# Altium PCB ECE453_Custom.PcbDoc
Units mil, origin at the board's own origin, x right, y up, seen from the top; angles counter-clockwise.
Board outline 2347.18 x 3917.24 mil, 2 copper layers (Top Layer, Bottom Layer); 26 components, 14 nets, 77 pads, 7 vias.
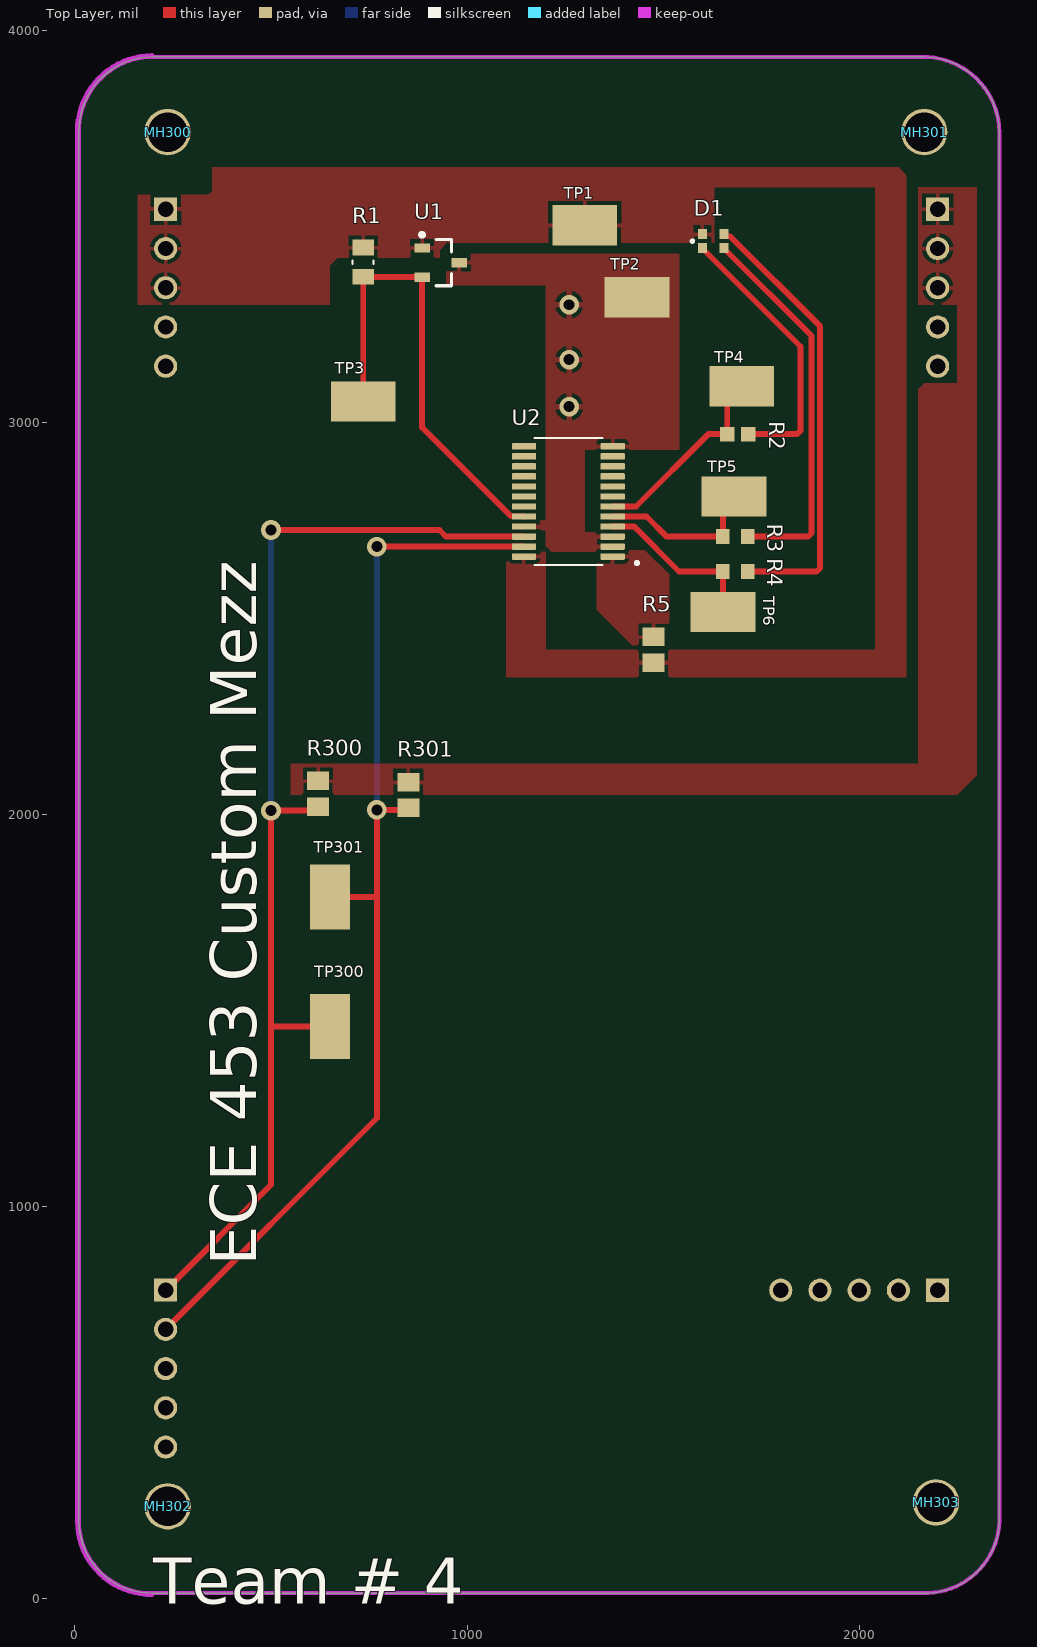
[diagram p0: Top Layer view]
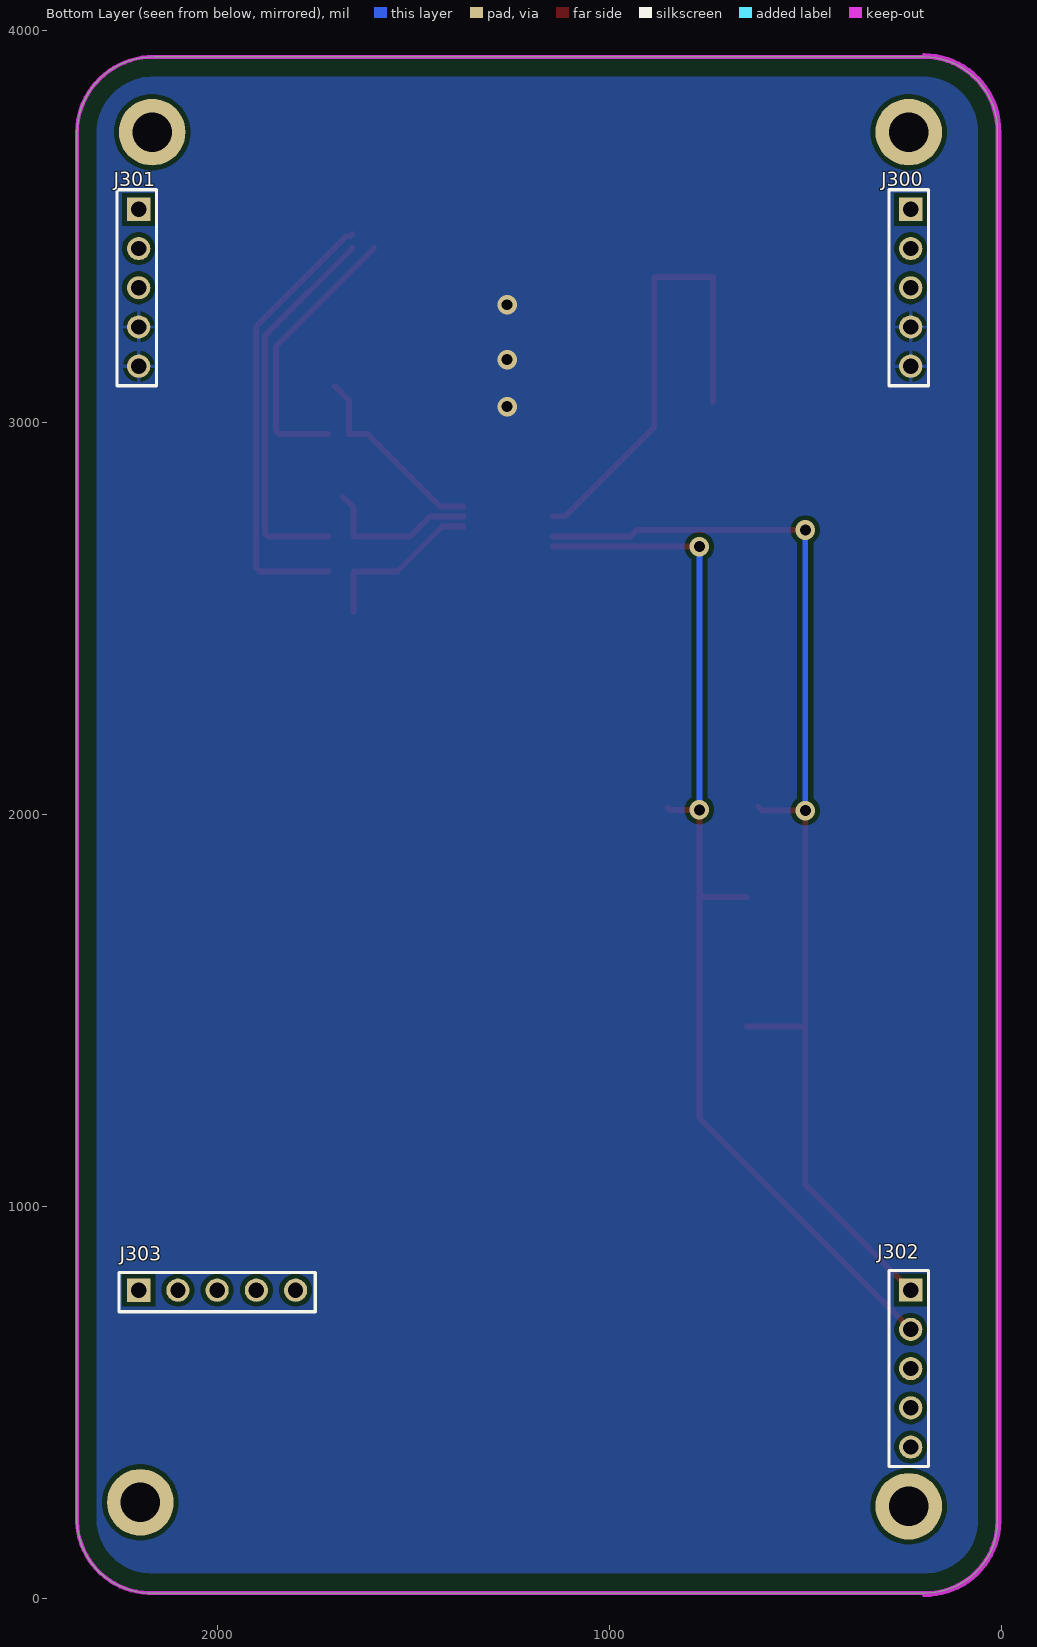
[diagram p1: Bottom Layer view, seen from below]
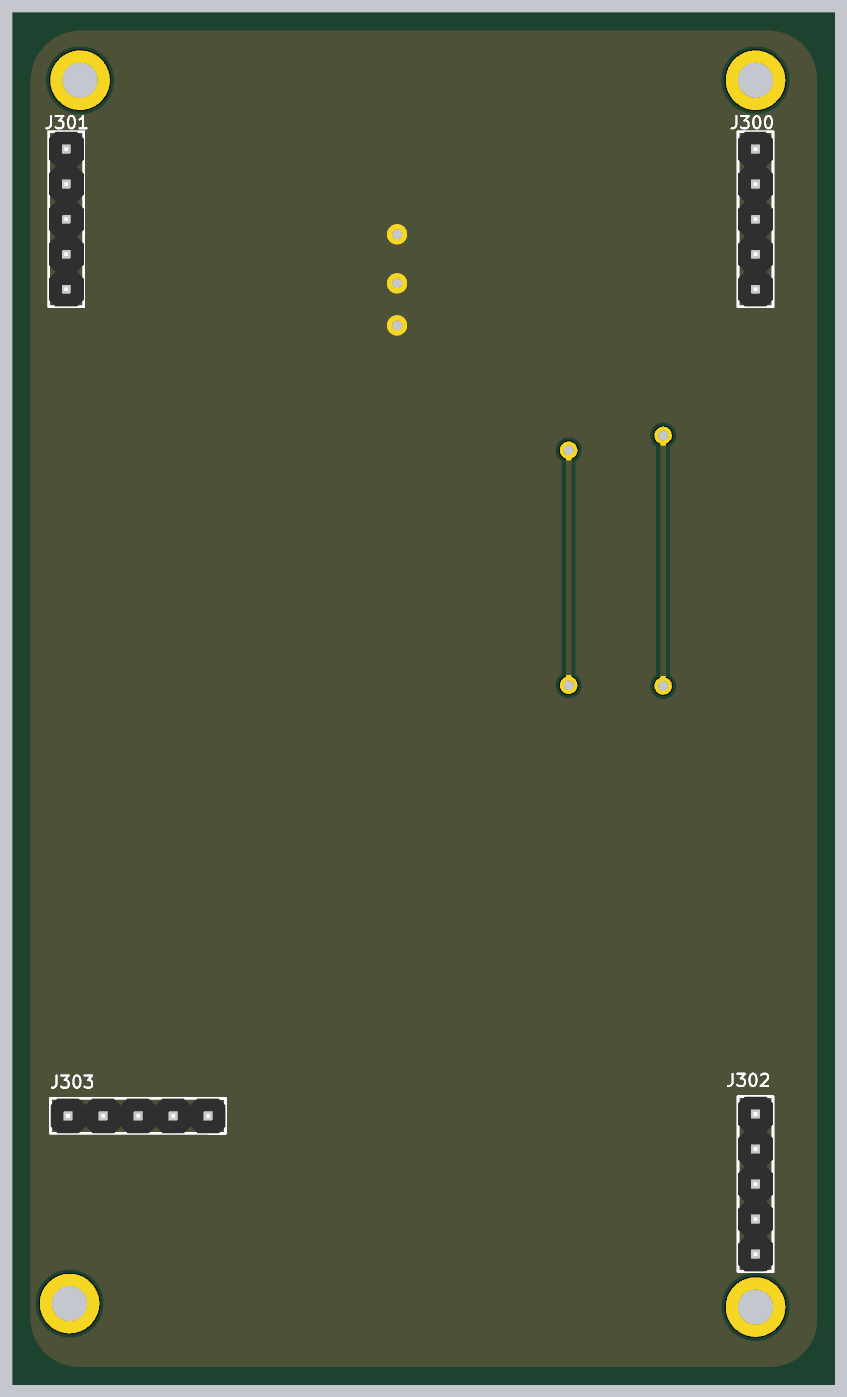
[diagram p2: 3D render of the assembled board from below, using the file's embedded part models]

## Layer stack, top to bottom
Top Solder: solder mask 0.4, Solder Resist, Dk 3.5
Top Layer: signal copper 1.4
Dielectric1: dielectric 12.6, FR-4, Dk 4.8
Bottom Layer: signal copper 1.4
Bottom Solder: solder mask 0.4, Solder Resist, Dk 3.5

## Board outline
10.01,196.88 ccw(c194.35,199.35) 196.78,15.01 cw(c196.85,10) 196.85,15.02 2160.35,15.02 cw(c2160.35,10) 2160.58,15.01 ccw(c2167.85,204.35) 2357.19,196.95 2357.19,3740.13 ccw(c2162.85,3737.66) 2160.45,3931.99 ccw(c2162.85,3737.66) 2160.42,3931.99 2160.45,3931.99 cw(c2160.35,3937.01) 2160.35,3931.99 200,3931.99 cw(c200,3937.01) 198.43,3932.25 cw(c196.85,3937.01) 196.91,3931.99 ccw(c199.35,3742.66) 10.01,3740.25 ccw(c199.35,3742.66) 10.01,3740.22 10.01,3740.25 cw(c5,3740.16) 10.01,3740.16 10.01,196.88 cw(c194.35,199.35)

## Design rules (kind name [scope] priority, off if disabled: settings)
BoardOutlineClearance [All] p1: gap=50 ignorepadtopadclearanceinfootprint=FALSE
Clearance Polygon_Clearance [All vs InPolygon] p1: gap=12 ignorepadtopadclearanceinfootprint=TRUE
Clearance [All] p2: gap=7 ignorepadtopadclearanceinfootprint=TRUE
ComponentClearance [InComponent('U3')] p1: gap=0 collisioncheckmode=3 verticalgap=10 showdistances=FALSE
Height [All] p1: minheight=0 maxheight=866.14 prefheight=500
HoleSize [All] p1: absolutevalues=TRUE maxlimit=250 minlimit=15 maxpercent=80.000 minpercent=20.000
MinimumAnnularRing [All] p1: minimumring=7
MinimumSolderMaskSliver [All] p1: minsoldermaskwidth=1
NetAntennae NetAntennae_5.0V [InNet('5.0V')] p1: netantennaetolerance=0
NetAntennae NetAntennae_3.3V [InNet('3.3V')] p2: netantennaetolerance=0
PolygonConnect [IsNamedPolygon('5.0V_L01_P019') or IsNamedPolygon('3.3V_L01_P020') vs IsVia] p1: connectstyle=Relief reliefconductorwidth=10 reliefentries=4 polygonreliefangle="90 Angle" airgapwidth=10
PolygonConnect PolygonConnect_2 [All vs IsVia] p2: connectstyle=Relief reliefconductorwidth=15 reliefentries=4 polygonreliefangle="90 Angle" airgapwidth=10
PolygonConnect PolygonConnect_1 [All] p3: connectstyle=Relief reliefconductorwidth=10 reliefentries=4 polygonreliefangle="90 Angle" airgapwidth=10
RoutingVias [All] p1: holewidth=15 width=30 viastyle="Through Hole" minholewidth=15 minwidth=30 maxholewidth=28 maxwidth=50
SilkToSilkClearance [All] p1: silktosilkclearance=1
SilkToSolderMaskClearance [IsPad] p1: minsilkscreentomaskgap=1 clearancetoexposedcopper=TRUE
SolderMaskExpansion [All] p1: expansion=4 istentingtop=FALSE
UnRoutedNet [All] p1: checkbadconnections=TRUE
Width [All] p1: maxlimit=472.44 minlimit=7 preferedwidth=15 minimp=50.000000 maximp=50.000000 favimp=50.000000
22 further rules are at their usual default settings.

## Components (designator, comment, footprint, x,y, rotation, side; value= is the part's Value field where it differs from the comment)
D1 "EAST1616RGBA2" EAST1616RGBA2 1655.12,3480 r180 top
J300 "CONN_HEADER_MALE_1x5" HDR1X5 236.22,3543.31 r270 bottom
J301 "CONN_HEADER_MALE_1x5" HDR1X5 2204.72,3543.31 r270 bottom
J302 "CONN_HEADER_MALE_1x5" HDR1X5 236.22,787.4 r270 bottom
J303 "CONN_HEADER_MALE_1x5" HDR1X5 2199.61,782.28 r180 bottom
MH300 "MHOLE_2_55MM" MHOLE_2_55MM#1 236.22,3740.16 r90 top locked
MH301 "MHOLE_2_55MM" MHOLE_2_55MM#1 2165.35,3740.16 r90 top locked
MH302 "MHOLE_2_55MM" MHOLE_2_55MM#1 236.22,236.22 r90 top locked
MH303 "MHOLE_2_55MM" MHOLE_2_55MM#2 2165.35,236.22 r0 top locked
R1 "RMCF0805JT510R" RESC2012X65N 735,3408.58 r90 top
R2 "RNCP0603FTD150R" RESC1508X50N 1690,2970 r0 top
R3 "ERJ-3GEYJ910V" RESC1608X55N 1683.6,2708.82 r0 top
R4 "ERJ-3GEYJ910V" RESC1608X55N 1683.6,2620 r0 top
R5 "RNCP0805FTD10K0" RESC2012X60N 1475,2420 r270 top
R300 "RNCP0805FTD10K0" RESC2012X60N 620,2052.87 r90 top
R301 "RNCP0805FTD10K0" RESC2012X60N 850,2050 r90 top
TP1 "TP_1206" TP-SMC-1206 1300,3502.8 r0 top
TP2 "TP_1206" TP-SMC-1206 1433.19,3319.04 r0 top
TP3 "TP_1206" TP-SMC-1206 735,3053.51 r0 top
TP4 "TP_1206" TP-SMC-1206 1700,3092.32 r0 top
TP5 "TP_1206" TP-SMC-1206 1680,2811.18 r0 top
TP6 "TP_1206" TP-SMC-1206 1652.1,2516.28 r0 top
TP300 "TP_1206" TP-SMC-1206 650,1460 r90 top
TP301 "TP_1206" TP-SMC-1206 650,1790 r90 top
U1 "TLV4961-1M" SOT95P245X110-3N 932.24,3407.4 r0 top
U2 "TCA9535PWR" SOP65P640X120-24N 1257.99,2798.39 r180 top

## Footprints (in the part's own frame and the unit in brackets; to place one, negate y for a bottom-side part, rotate by r counter-clockwise, add the part's x,y. Pads: shape width x height; smd on the part's side, far side on the other; paste and mask are expansions set on the pad)
EAST1616RGBA2 [mm] "EAST1616RGBA2 RBG LED"
  rect 0.6x0.65 smd: 1(1.4,0.9) 2(0,0.9) 3(1.4,0) 4(0,0)
  silkscreen extent 1.95,0.35 2.15,0.55
HDR1X5 [mil] "Connector; Header; 5 Position"
  rect 59.06x59.06 hole 39: 1(0,5)
  round 59.06 hole 39: 2(100,5) 3(200,5) 4(300,5) 5(400,5)
  silkscreen extent -50,-50 450,50, body extent -50,-50 450,50, height 330
MHOLE_2_55MM#1 [mm] "2.55MM Mounting Hole"
  round 3 / inner round 4.572 / far side round 4.318 hole 2.55: 1(0,0)
MHOLE_2_55MM#2 [mm]
  round 3 / inner round 4.572 / far side round 4.318 hole 2.55: 1(0.762,0.254)
RESC1508X50N [mm]
  rect 0.97x0.93 smd: 1(-0.68,0) 2(0.68,0)
RESC1608X55N [mm]
  rect 0.87x0.98 smd: 1(-0.8,0) 2(0.8,0)
RESC2012X60N [mm]
  rect 1.2x1.42 smd: 1(-0.835,0) 2(0.835,0)
RESC2012X65N [mm]
  rect 1.01x1.38 smd: 1(-0.95,0) 2(0.95,0)
  silkscreen extent -0.12,-0.68 0.12,0.68
SOP65P640X120-24N [mm]
  rrect25% 1.57x0.41 smd: 1(-2.87,3.575) 2(-2.87,2.925) 3(-2.87,2.275) 4(-2.87,1.625) 5(-2.87,0.975) 6(-2.87,0.325) 7(-2.87,-0.325) 8(-2.87,-0.975) 9(-2.87,-1.625) 10(-2.87,-2.275) 11(-2.87,-2.925) 12(-2.87,-3.575) 13(2.87,-3.575) 14(2.87,-2.925) 15(2.87,-2.275) 16(2.87,-1.625) 17(2.87,-0.975) 18(2.87,-0.325) 19(2.87,0.325) 20(2.87,0.975) 21(2.87,1.625) 22(2.87,2.275) 23(2.87,2.925) 24(2.87,3.575)
  silkscreen extent -4.54,-4.1 2.2,4.1
SOT95P245X110-3N [mm] "SOT23, 3-Leads, Body 2.90x2.45mm, Pitch 0.95mm, IPC Medium Density"
  rect 1x0.6 smd: 1(-1.2,0.95) 2(-1.2,-0.95) 3(1.2,0)
  silkscreen extent -1.32,-1.5 0.7,1.92, body extent -0.7,-1.5 0.7,1.5, height 1.1
TP-SMC-1206 [mm]
  rect 4.2x2.6 smd mask+0: 1(0,0)
  body extent -1.57,-0.79 1.63,0.81, height 1.22

## Part data
J300 J301 J302 J303: "Header, 5-Pin", Color=Black, Manufacturer 1=Sullins, Manufacturer Part Number 1=PREC005SACN-RC, Package Quantity=1, Supplier Part Number 1=S1032EC-05-ND, ComponentLink1Description=http://www.farnell.com/cad/1737268.pdf, ComponentLink1URL=http://www.farnell.com/cad/1737268.pdf, ComponentLink2Description=http://katalog.we-online.de/em/datasheet/6130xx11121.pdf, ComponentLink2URL=http://katalog.we-online.de/em/datasheet/6130xx11121.pdf, ComponentLink3Description=https://datasheet.ciiva.com/741/xrxczzzsxxn-rc-st-11635-b-741840.pdf?src-supplier=Digi-Key, ComponentLink3URL=https://datasheet.ciiva.com/741/xrxczzzsxxn-rc-st-11635-b-741840.pdf?src-supplier=Digi-Key, Connector Type="Male Pin", Contact Mating Length=0.23inch, Contact Plating=Tin, Mount="Through Hole", Number of Positions=5, Number of Rows=1, Packaging=Bulk, Pitch=0.1inch, Pricing 1="1=0.19000, 10=0.17400, 25=0.12960, 50=0.11120, 100=0.10740, 250=0.09264, 500=0.08892 (USD)", RoHS=Yes, Stock 1=0, Supplier 1=Digi-Key, Termination=Solder
MH300 MH301 MH302 MH303: "Mounting Holde", Manufacturer Part Number="UW MTHOLE"
R1 R2: Package=None, Availability=Unavailable, Price=None
  R1: MP=RMCF0805JT510R
  R2: MP=RNCP0603FTD150R
R3 R4: "Res Thick Film 0603 91 Ohm 5% 1/10W Ã‚Â±200ppm/Ã‚Â°C Molded SMD SMD Punched Carrier T/R", Package=None, Availability=Unavailable, MP=ERJ-3GEYJ910V, Price=None
R5 R300 R301: "10 kOhms Â±1% 0.25W, 1/4W Chip Resistor 0805 _2012 Metric_ Anti-Sulfur, Moisture Resistant Thin Film", Package="2012 Stackpole", Digi-Key_Part_Number=RNCP0805FTD10K0CT-ND, Digi-Key_Purchase_URL=https://www.digikey.com/product-detail/en/stackpole-electronics-inc/RNCP0805FTD10K0/RNCP0805FTD10K0CT-ND/2240601?utm_source=snapeda&utm_medium=aggregator&utm_campaign=symbol, MF="Stackpole Electronics Inc", MP=RNCP0805FTD10K0, SnapEDA_Link=https://www.snapeda.com/parts/RNCP0805FTD10K0/Stackpole%20Electronics%20Inc/view-part/3229162/?ref=snap
TP1 TP2 TP3 TP4 TP5 TP6 TP300 TP301: "Test Point SMD 1206", Case Size=1206, Manufacturer="TE Connectivity (Tyco Electronics)", Manufacturer Part Number=1625854-1, Operating Temperature="-55 to 125 C", Power Rating=N/R, Resistance Value="0 Ohm", Supplier Part Number=A106143CT-ND, ComponentLink1Description=https://datasheet.ciiva.com/6439/eng-ds-1773266-a-6439169.pdf, ComponentLink1URL=https://datasheet.ciiva.com/6439/eng-ds-1773266-a-6439169.pdf, ComponentLink2Description=https://datasheet.ciiva.com/30136/1773266-a-30136341.pdf, ComponentLink2URL=https://datasheet.ciiva.com/30136/1773266-a-30136341.pdf, ComponentLink3Description=https://datasheet.ciiva.com/6439/eng-ds-1773266-a-6439080.pdf, ComponentLink3URL=https://datasheet.ciiva.com/6439/eng-ds-1773266-a-6439080.pdf, ComponentLink4Description=https://datasheet.ciiva.com/6439/eng-ds-1773266-a-6439081.pdf, ComponentLink4URL=https://datasheet.ciiva.com/6439/eng-ds-1773266-a-6439081.pdf, ComponentLink5Description=https://datasheet.ciiva.com/6439/eng-ds-1773266-a-6439083.pdf, ComponentLink5URL=https://datasheet.ciiva.com/6439/eng-ds-1773266-a-6439083.pdf, Dimension="3.2 x 1.6 x 1.25mm", Family=RC, Mounting="Surface Mount", Packaging="Tape and Reel", Part No=1625854-1, Pricing 1="1=0.28, 10=0.261, 25=0.224, 50=0.1902, 100=0.1828, 250=0.1641, 500=0.1567, 1000=0.1306 (USD)", RoHS=Yes, Stock 1=31937, Supplier=Digi-Key, Temperature Coefficient=N/R, Terminal Pitch=N/R, Termination Style=N/R, Tolerance=N/R
U1: "Hall Effect Sensor"
U2: "Remote 16-Bit I2C and SMBus, Low-Power I/O Expander With Interrupt Output and Config Registers 24-TSSOP -40 to 85", Package="TSSOP-24 Texas Instruments", Arrow_Electronics-Purchase-URL=https://snapeda.com/shop?store=Arrow+Electronics&id=1237891, Availability=Good, BuyPart=https://www.snapeda.com/parts/TCA9535PWR/Texas%20Instruments/view-part/1237891/?ref=eda, DigiKey-Purchase-URL=https://snapeda.com/shop?store=DigiKey&id=1237891, MF="Texas Instruments", Mouser-Purchase-URL=https://snapeda.com/shop?store=Mouser&id=1237891, MP=TCA9535PWR, Price=None, SnapEDA_Link=https://www.snapeda.com/parts/TCA9535PWR/Texas%20Instruments/view-part/1237891/?ref=snap, Texas_Instruments-Purchase-URL=https://snapeda.com/shop?store=Texas+Instruments&id=1237891

## Via types
v1: diameter 50, hole 28, Top Layer to Bottom Layer, 7 vias

## Nets (pads, with @x,y where several pads share a name; then routed paths per layer and width w, separated by ;. In a path a pad name is that pad's centre, name@x,y a point inside that pad or via, vN(x,y) a via of type N, cw(c..) or ccw(c..) an arc to the next point about the centre after c; other vN are vias at no path point)
3.3V: J301.1 J301.2 J301.3 R300.2 R301.2
5.0V: D1.3 J300.1 J300.2 J300.3 R1.2 R5.2 TP1.1 U1.1 U2.24
BD1: D1.4 R4.2 | length 1147.4
  Top Layer w15: D1.4 1655.12,3479.02 1659.43,3474.7 1670.09,3474.7 1900,3244.8 1900,2628.79 1891.21,2620 R4.2
GD1: D1.2 R3.2 | length 985.8
  Top Layer w15: D1.2 1655.12,3443.58 1878,3220.7 1878,2717.61 1869.21,2708.82 R3.2
GND: J300.4 J300.5 J301.4 J301.5 TP2.1 U1.3 U2.2 U2.3 U2.12 U2.21
  other v1: 1260,3040 1260,3160 1260,3300
HE_Q: R1.1 TP3.1 U1.2 U2.20 | length 1205
  Top Layer w15: TP3.1 R1.1 735.59,3370.59 884.41,3370.59 U1.2 885,2987.29 1111.72,2760.57 1144.43,2760.57 U2.20
I2C_SCL: J302.1 R300.1 TP300.1 U2.22 | length 2975.6
  Top Layer w15: J302.1 500,1056.18 500,1460 ; v1(500,2725.6) 929.51,2725.6 946.29,2708.82 U2.22 ; R300.1 610,2010 v1(500,2010) 500,1460 ; TP300.1 500,1460
  Bottom Layer w15: v1(500,2010) v1(500,2725.6)
I2C_SDA: J302.2 R301.1 TP301.1 U2.23 | length 2796.1
  Top Layer w15: J302.2 770,1226.18 770,1790 ; TP301.1 770,1790 ; v1(770,2683.23) U2.23 ; R301.1 844.87,2012 v1(770,2012) 770,1790
  Bottom Layer w15: v1(770,2012) v1(770,2683.23)
IO_B: R4.1 TP6.1 U2.4 | length 432.2
  Top Layer w15: U2.4 1425.9,2734.41 1540.3,2620 R4.1 TP6.1
IO_G: R3.1 TP5.1 U2.5 | length 416.2
  Top Layer w15: U2.5 1457.51,2760 1508.69,2708.82 R3.1 1652.1,2783.28 TP5.1
IO_INT: R5.1 U2.1
IO_R: R2.1 TP4.1 U2.6 | length 506.2
  Top Layer w15: U2.6 1430.52,2785.59 1614.93,2970 R2.1 1663.23,3055.55 TP4.1
RD1: D1.1 R2.2 | length 706.2
  Top Layer w15: D1.1 1600,3443.58 1850,3193.58 1850,2978.79 1841.21,2970 R2.2
XRES_N: J302.5
pads on no net: J302.3 J302.4 J303.1 J303.2 J303.3 J303.4 J303.5 MH300.1 MH301.1 MH302.1 MH303.1 U2.7 U2.8 U2.9 U2.10 U2.11 U2.13 U2.14 U2.15 U2.16 U2.17 U2.18 U2.19

## Polygon pours and split planes (outlines as drawn)
5.0V on Top Layer "5.0V_L01_P003" (solid, remove dead copper, pour order 3): 1200,2670 1100,2670 1100,2350 2120,2350 2120,3630 2100,3650 350,3650 350,3590 340,3580 160,3580 160,3300 650,3300 650,3400 670,3420 929.51,3420 929.51,3439.51 950,3460 951.44,3458.56 1630,3458.56 1630,3600 2040,3600 2040,2420 1200,2420
IO_INT on Top Layer "IO_INT_L01_P005" (solid, remove dead copper, pour order 5): 1435.05,2417.99 1437.06,2420 1514.95,2420 1514.95,2612.56 1452.88,2674.63 1330.35,2674.63 1330.35,2522.84 1433.19,2420
GND on Top Layer "GND_L01_P004" (solid, remove dead copper, pour order 4): 1300,2930 1540.3,2930 1540.3,3429.76 1409.46,3429.76 946.29,3429.76 946.29,3350 1200,3350 1200,2750 1100,2750 1100,2725.6 1200,2725.6 1200,2680 1210,2670 1410,2670 1410,2720 1300,2720
3.3V on Top Layer "3.3V_L01_P000" (solid, pour order 0): 550,2050 2250,2050 2300,2100 2300,3600 2150,3600 2150,3300 2250,3300 2250,3100 2165.35,3100 2150,3084.65 2150,2130 550,2130
GND on Bottom Layer "GND_L02_P001" (solid, remove dead copper, pour order 1): 0,3930 0,0 2360,0 2360,3940

## Keep-outs
Keep-Out Layer:
  lines w10: 10.01,196.92 ccw(c194.35,199.35) 10.01,196.88 ; 5,196.85 ccw(c194.35,199.35) 196.85,10 cw(c194.35,199.35) 5,196.85 ; 5,196.85 5,3740.16 ; 5,196.85 5,3740.16 ; 5,3740.16 cw(c199.35,3742.66) 196.85,3937.01 ; 5,3740.16 cw(c199.35,3742.66) 196.85,3937.01 ; 10.01,196.88 ccw(c194.35,199.35) 196.78,15.01 cw(c196.85,10) 196.85,15.02 2160.35,15.02 cw(c2160.35,10) 2160.58,15.01 ccw(c2167.85,204.35) 2357.19,196.95 2357.19,3740.13 ccw(c2162.85,3737.66) 2160.45,3931.99 ; 10.01,196.88 10.01,3740.16 ccw(c5,3740.16) 10.01,3740.25 ; 10.01,3740.25 ccw(c199.35,3742.66) 10.01,3740.22 10.01,3740.25 ; 10.01,3740.25 cw(c199.35,3742.66) 196.91,3931.99 ccw(c196.85,3937.01) 198.43,3932.25 ccw(c200,3937.01) 200,3931.99 2160.35,3931.99 ccw(c2160.35,3937.01) 2160.45,3931.99 ; 196.85,3937.01 196.85,3937.01 ; 196.85,3937.01 196.85,3937.01 ; 2160.45,3931.99 ccw(c2162.85,3737.66) 2160.42,3931.99 ; 2160.42,3931.99 2160.45,3931.99

## Silkscreen, mask and mechanical layers (free items; w line width, h text height)
Top Overlay:
  text "ECE 453 Custom Mezz" at 500,850 h200 r90
  text "Team # 4" at 200,-50 h200
Mechanical 2:
  lines w10: 196.85,3937.01 ccw(c199.35,3742.66) 5,3740.16 5,196.85 ccw(c194.35,199.35) 196.85,10 ; 200,3937.01 2160.35,3937.01 cw(c2162.85,3737.66) 2362.2,3740.16 2362.2,196.85 cw(c2167.85,204.35) 2160.35,10 196.85,10 ; 196.85,10 196.85,10

## Dimensions
1799.61,787.28 to 231.22,787.4 on Mechanical 5
2199.72,3543.31 to 2199.61,787.28 on Mechanical 5
231.22,3543.31 to 231.22,787.4 on Mechanical 5
231.22,3543.31 to 2199.72,3543.31 on Mechanical 5